# Altium PCB PCB1.PcbDoc
Units mm, origin at the board's own origin, x right, y up, seen from the top; angles counter-clockwise.
Board outline 100 x 50 mm, 2 copper layers (Top Layer, Bottom Layer); 26 components, 20 nets, 100 pads, 0 vias.
Unrouted connection lines stored in the file: 62.
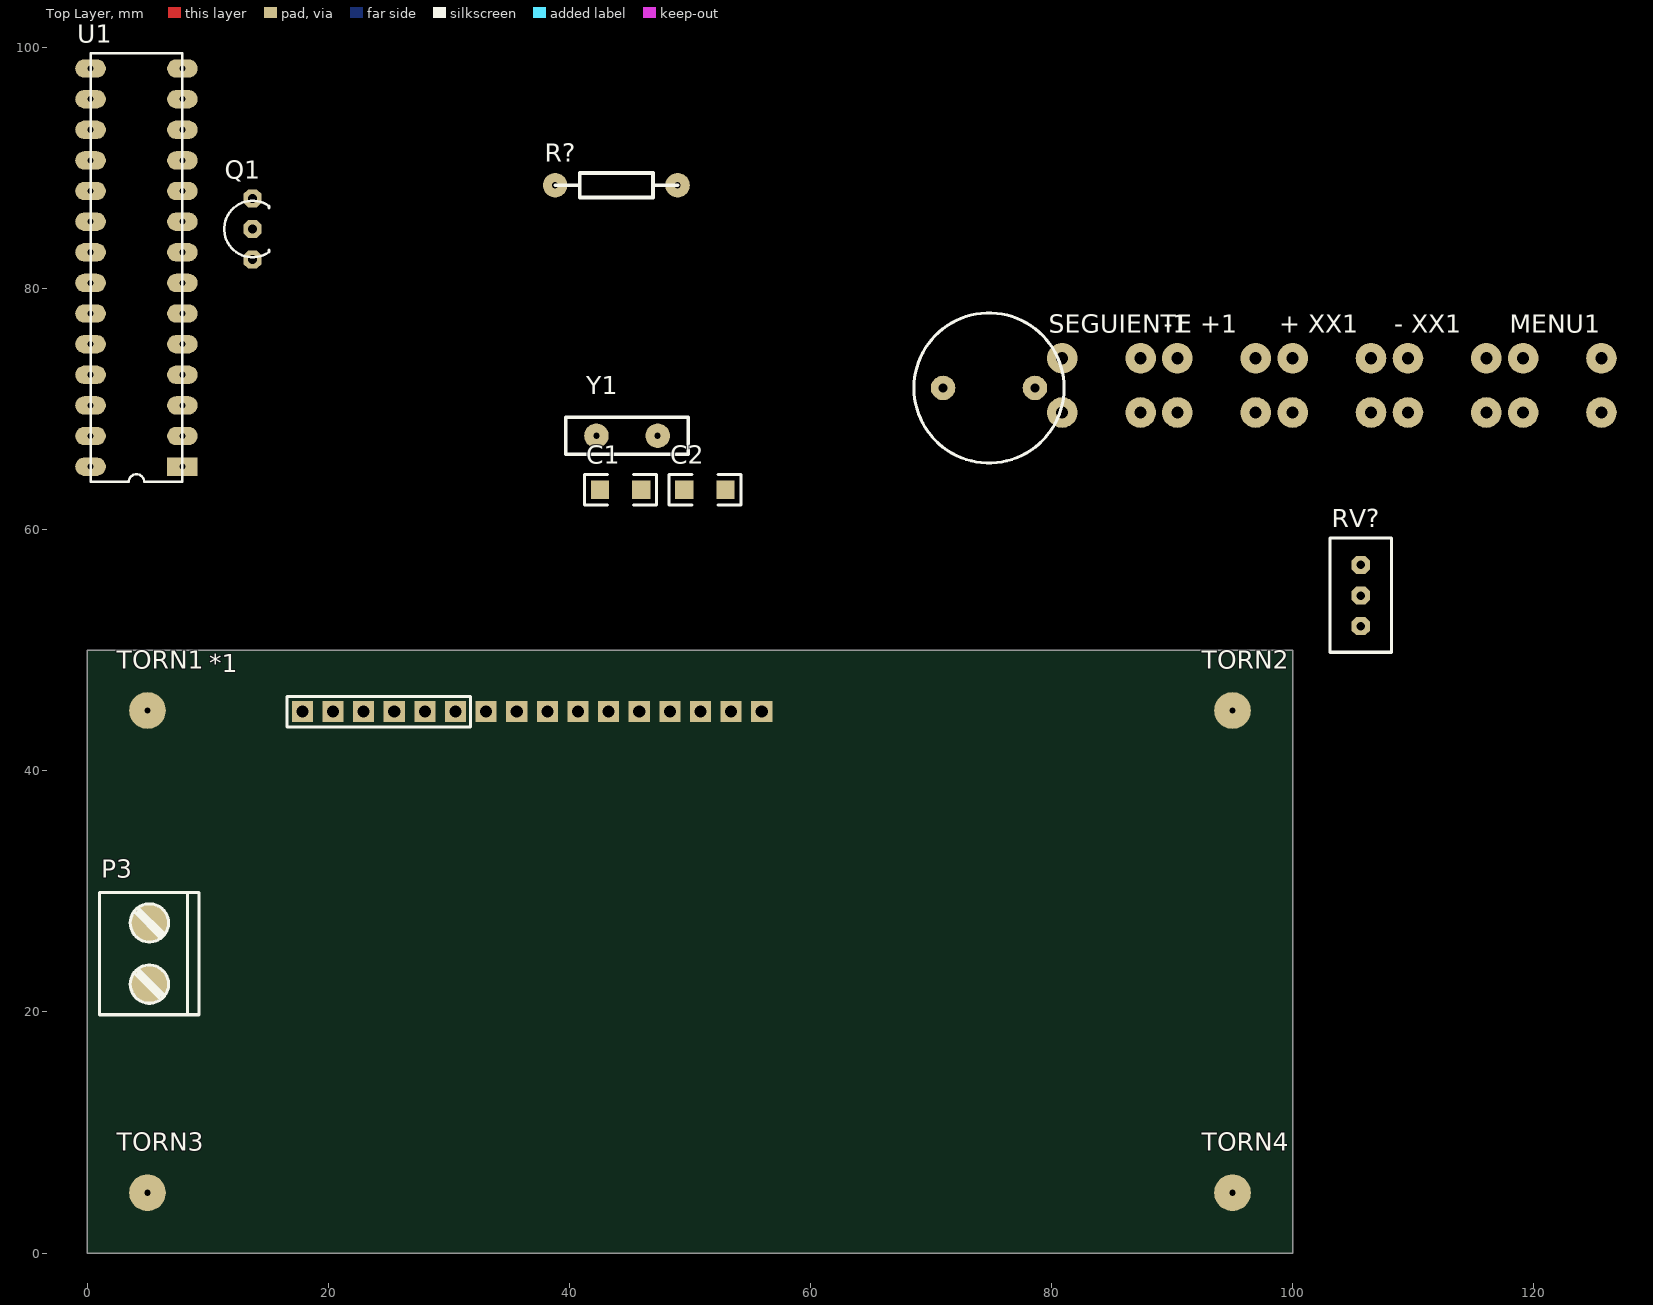
[diagram p0: Top Layer view]
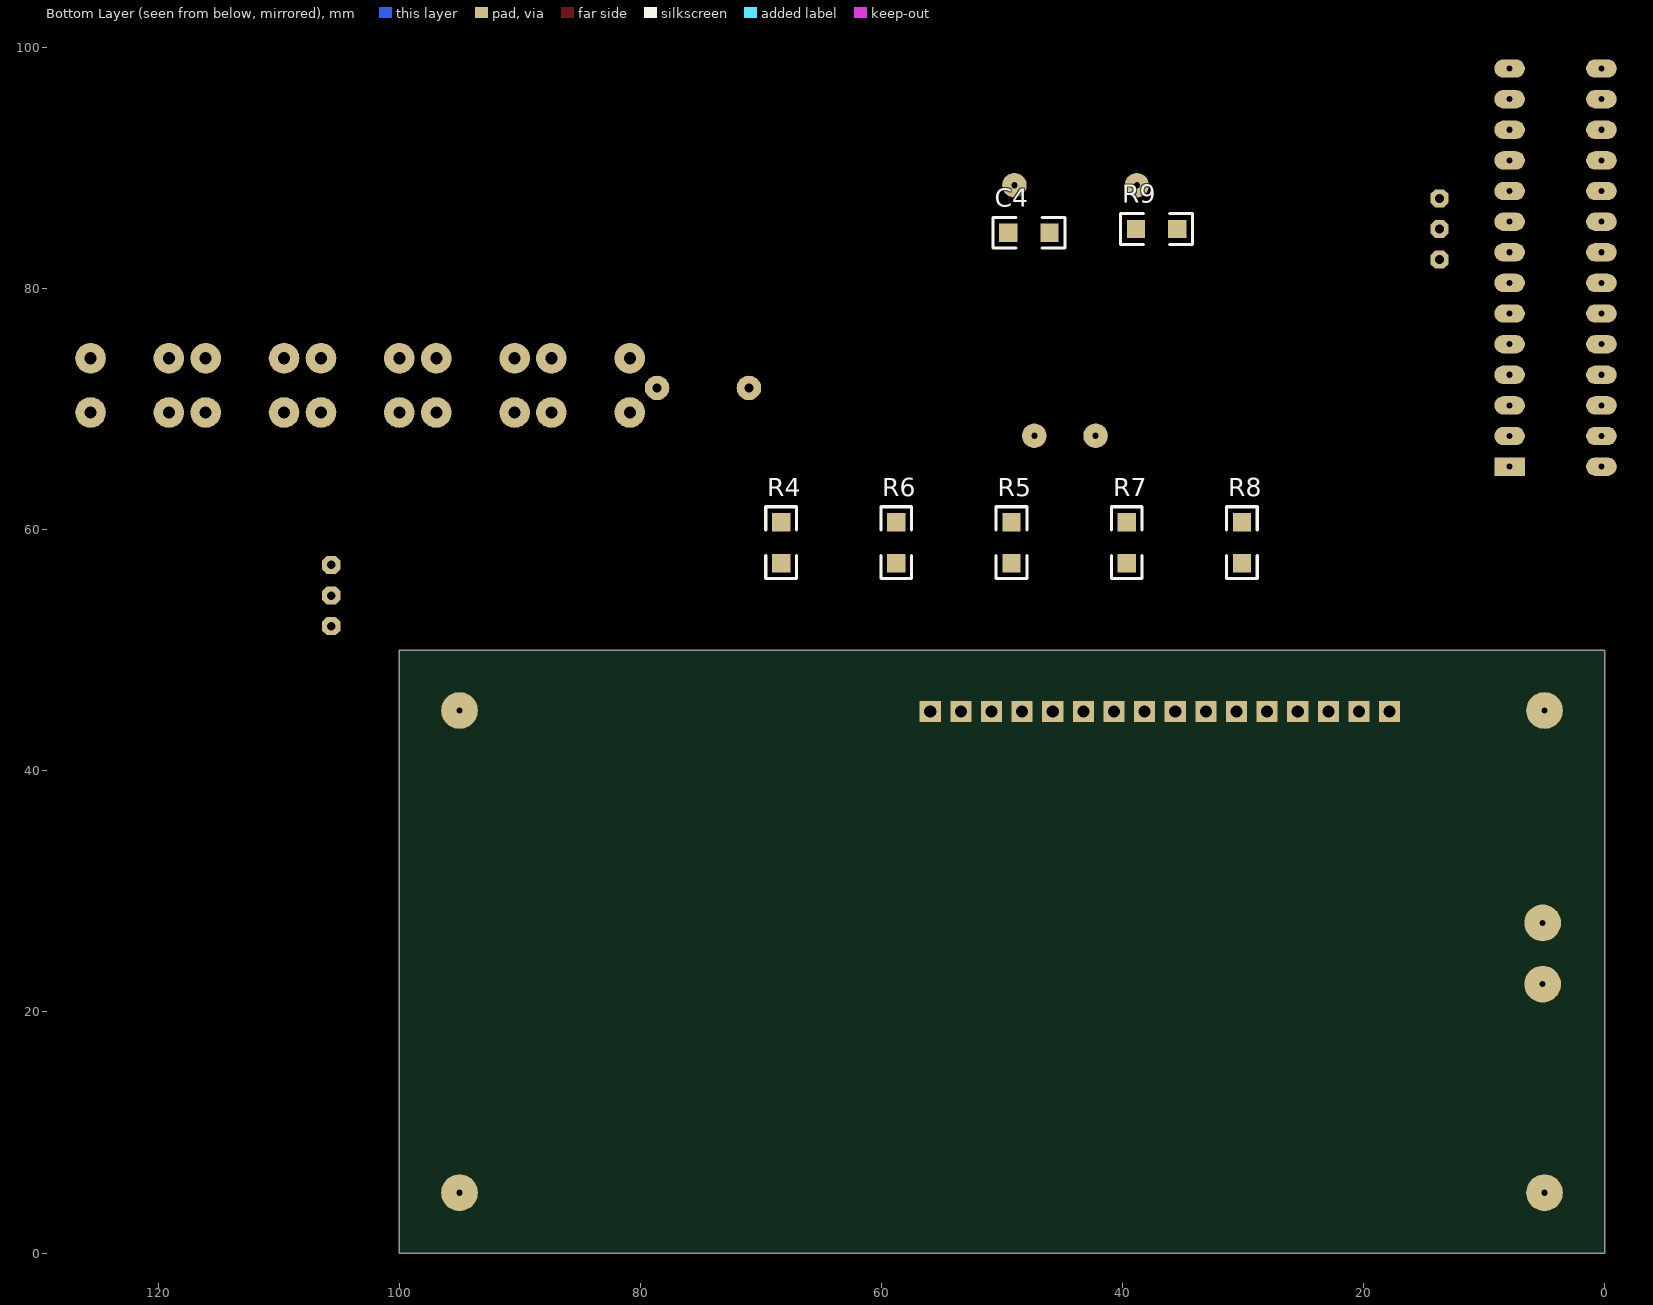
[diagram p1: Bottom Layer view, seen from below]

## Layer stack, top to bottom
Top Solder: solder mask 0.0102, Solder Resist, Dk 3.5
Top Layer: signal copper 0.0356
Dielectric 1: dielectric 0.32, FR-4, Dk 4.8
Bottom Layer: signal copper 0.0356
Bottom Solder: solder mask 0.0102, Solder Resist, Dk 3.5

## Board outline
0,0 100,0 100,50 0,50

## Design rules (kind name [scope] priority, off if disabled: settings)
Clearance [All] p1: gap=0.508
ComponentClearance [All] p1: gap=0 collisioncheckmode=3 verticalgap=0 showdistances=FALSE
PolygonConnect [All] p1: connectstyle=Relief reliefconductorwidth=0.254 reliefentries=4 polygonreliefangle="90 Angle" airgapwidth=0.254
RoutingVias [All] p1: holewidth=0.711 width=1.27 viastyle="Through Hole" minholewidth=0.711 minwidth=1.27 maxholewidth=0.711 maxwidth=1.27
SolderMaskExpansion [All] p1: expansion=0.102
UnpouredPolygon [All] p1: allowunpoured=FALSE
Width [All] p1: maxlimit=5.08 minlimit=0.61 preferedwidth=0.61
28 further rules are at their usual default settings.

## Classes and differential pairs
component class Sheet1: *1 "+ XX1" -1 "- XX1" C1 C2 C4 MENU1 P3 Q1 R4 R5 R6 R7 R8 R9 R? RV? "SEGUIENTE +1" TORN1 TORN2 TORN3 TORN4

## Components (designator, comment, footprint, x,y, rotation, side; value= is the part's Value field where it differs from the comment)
*1 "HEADER 1X16" "DISPLAY LCD 16x2" 17.851,44.907 r0 top
"+ XX1" "PULSADOR" PULSADOR4_ALTO 106.491,74.219 r180 top
-1 "PULSADOR" PULSADOR4_ALTO 96.926,74.219 r180 top
"- XX1" "PULSADOR" PULSADOR4_ALTO 116.053,74.219 r180 top
C1 "Comment" 1206_Cap 44.25,63.322 r180 top
C2 "Comment" 1206_Cap 51.23,63.322 r0 top
C4 "Comment" 1206_Cap 47.777,84.633 r180 bottom
MENU1 "PULSADOR" PULSADOR4_ALTO 125.603,74.219 r180 top
P3 "POWER IN" "BORNERA2 azul" 5.156,27.381 r270 top
Q1 "NPN" TO92 13.716,84.938 r0 top
R4 "Comment" 1206 68.326,57.201 r90 bottom
R5 "Comment" 1206 49.214,57.201 r90 bottom
R6 "Comment" 1206 58.776,57.201 r90 bottom
R7 "Comment" 1206 39.649,57.201 r90 bottom
R8 "Comment" 1206 30.099,57.201 r90 bottom
R9 "Comment" 1206 38.887,84.938 r180 bottom
R? "Comment" RES0.4 48.971,88.57 r180 top
RV? "Potenciometro" "Multivuelta Lateral" 105.639,54.534 r90 top
"SEGUIENTE +1" "PULSADOR" PULSADOR4_ALTO 87.376,74.219 r180 top
TORN1 "POWER IN" TORNILLO 5,45 r0 top
TORN2 "POWER IN" TORNILLO 95,45 r0 top
TORN3 "POWER IN" TORNILLO 5,5 r0 top
TORN4 "POWER IN" TORNILLO 95,5 r0 top
U1 "PIC16F876A" DIP28 7.899,65.227 r180 top
Y1 "5M" CRISTAL 42.24,67.793 r0 top
? "BUZZER_1" Buzzer 74.803,71.755 r180 top

## Footprints (in the part's own frame and the unit in brackets; to place one, negate y for a bottom-side part, rotate by r counter-clockwise, add the part's x,y. Pads: shape width x height; smd on the part's side, far side on the other; paste and mask are expansions set on the pad)
1206 [mil]
  rect 60x60 smd: 1(0,0) 2(135,0)
  silkscreen extent -50,-50 185,50, body extent 4,-32 130,31, height 39
1206_Cap [mil]
  rect 60x60 smd: 1(-67.5,0) 2(67.5,0)
  silkscreen extent -118,-50 118,50, body extent -61,-31 64,32, height 39
"BORNERA2 azul" [mil]
  round 120 hole 20: 1(0,0) 2(200,0)
  silkscreen extent -100,-163 300,163, body extent -117,-122 300,178, height 394
Buzzer [mil]
  round 80 hole 29.53: 1(150,0) 2(-150,0)
  silkscreen extent -245,-245 245,245, body extent -235,-236 374,236, height 380
CRISTAL [mil]
  round 80 hole 20: 1(0,0) 2(200,0)
  silkscreen extent -100,-60 300,60, body extent -128,-92 319,91, height 138
DIP28 [mil]
  rect 100x60 hole 20: 1(0,0)
  oval 100x60 hole 20: 2(0,-100) 3(0,-200) 4(0,-300) 5(0,-400) 6(0,-500) 7(0,-600) 8(0,-700) 9(0,-800) 10(0,-900) 11(0,-1000) 12(0,-1100) 13(0,-1200) 14(0,-1300) 15(300,-1300) 16(300,-1200) 17(300,-1100) 18(300,-1000) 19(300,-900) 20(300,-800) 21(300,-700) 22(300,-600) 23(300,-500) 24(300,-400) 25(300,-300) 26(300,-200) 27(300,-100) 28(300,0)
  silkscreen extent 0,-1350 300,50, body extent 4,-1341 312,39, height 180
"DISPLAY LCD 16x2" [mm]
  rect 1.75x1.75 hole 1: 1(0,0) 2(2.54,0) 3(5.08,0) 4(7.62,0) 5(10.16,0) 6(12.7,0) 7(15.24,0) 8(17.78,0) 9(20.32,0) 10(22.86,0) 11(25.4,0) 12(27.94,0) 13(30.48,0) 14(33.02,0) 15(35.56,0) 16(38.1,0)
  silkscreen extent -1.27,-1.27 13.95,1.27, body extent -7.98,-33.49 72.27,2.51, height 8.44
"Multivuelta Lateral" [mm]
  oct 1.5x1.5 hole 0.7: 1(-2.54,0) 2(0,0) 3(2.54,0)
  silkscreen extent -4.7,-2.54 4.77,2.54, body extent -4.76,-2.47 4.76,2.36, height 4.55
PULSADOR4_ALTO [mm]
  round 2.54 hole 1: 1(0,0) 1(6.5,0) 2(0,4.5) 2(6.5,4.5)
  body extent -0.58,-0.76 7.11,5.25, height 13.11
RES0.4 [mil]
  round 80 hole 20: 1(0,0) 2(400,0)
  silkscreen extent 0,-40 400,40, body extent -12,-45 412,46, height 90
TO92 [mm]
  oct 1.5x1.5 hole 0.75: 1(0,2.54) 2(0,0) 3(0,-2.54)
  silkscreen extent -2.34,-2.34 1.35,2.34, body extent -2.55,-2.77 1.53,2.77, height 7.7
TORNILLO [mil]
  round 120 hole 20: 1(0,0)
  body extent -110,-114 110,107, height 94

## Part data
"+ XX1" -1 "- XX1" MENU1 "SEGUIENTE +1": "Switch"
C1 C2 C4: library part "Cap Semi", "Capacitor (Semiconductor SIM Model)"
P3: library part "Header 2", "Header, 2-Pin"
Q1: "PNP Bipolar Transistor"
R4 R5 R6 R7 R8 R9 R?: library part "Res Semi", "Semiconductor Resistor"
RV?: "Potentiometer"
TORN1 TORN2 TORN3 TORN4: library part "Header 1", "Header, 2-Pin"
Y1: library part XTAL, "Crystal Oscillator"

## Nets (pads, with @x,y where several pads share a name; then routed paths per layer and width w, separated by ;. In a path a pad name is that pad's centre, name@x,y a point inside that pad or via, vN(x,y) a via of type N, cw(c..) or ccw(c..) an arc to the next point about the centre after c; other vN are vias at no path point)
D4: *1.11 U1.15
D5: *1.12 U1.16
D6: *1.13 U1.17
D7: *1.14 U1.18
E: *1.6 U1.14
GND: *1.1 *1.5 *1.16 C1.1 C2.1 C4.1 P3.2 Q1.1 R4.2 R5.2 R6.2 R7.2 R8.2 RV?.1 U1.8 U1.19
Net*1_3: *1.3 RV?.3
Net*1_15: *1.15 R?.1
Net_2: ?.2 Q1.3
NetQ1_2: Q1.2 R9.2
OSC1: C1.2 U1.9 Y1.1
OSC2: C2.2 U1.10 Y1.2
RA1: "SEGUIENTE +1.1" R8.1 U1.3
RA2: -1.1 R7.1 U1.4
RA3: "- XX1.1" R6.1 U1.5
RA4: "+ XX1.1" R5.1 U1.6
RA5: MENU1.1 R4.1 U1.7
RB2: R9.1 U1.23
RS: *1.4 U1.13
VCC: "+ XX1.2" "- XX1.2" "SEGUIENTE +1.2" *1.2 -1.2 ?.1 C4.2 MENU1.2 P3.1 R?.2 RV?.2 U1.1 U1.20
pads on no net: *1.7 *1.8 *1.9 *1.10 TORN1.1 TORN2.1 TORN3.1 TORN4.1 U1.2 U1.11 U1.12 U1.21 U1.22 U1.24 U1.25 U1.26 U1.27 U1.28

## Silkscreen, mask and mechanical layers (free items; w line width, h text height)
Mechanical 1:
  the board outline again, w1